# EAGLE board periph_rev4 (EAGLE 5.06)
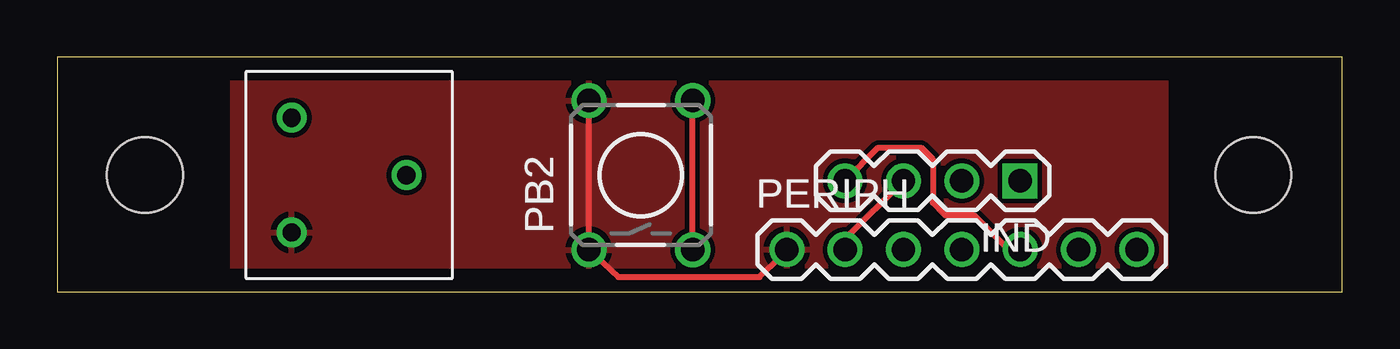
[diagram p0: board, top side]
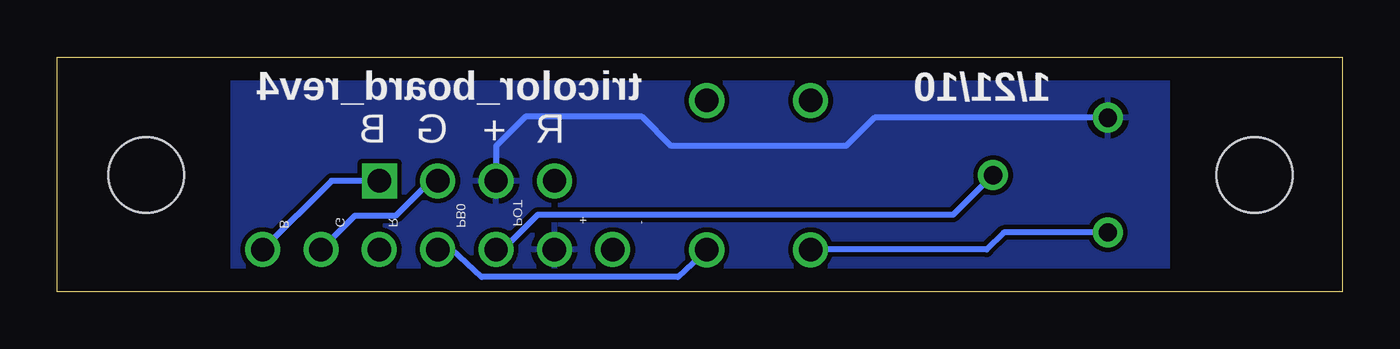
[diagram p1: board, bottom side, seen from below]

Size 55.93 x 10.21 mm. Coordinates in mm from the lower left corner, seen from the top.
Outline: 0,0 55.93,0 55.93,10.21 0,10.21 0,0
Copper layers (1*16): Top 0.035mm / dielectric 1.5mm / Bottom 0.035mm
Design rules "default": minimum track width 10mil, minimum drill 24mil, track to track 8mil, track to pad 8mil, pad to pad 8mil, via to via 8mil, smd to smd 8mil, copper to edge 40mil, drill to drill 8mil, minimum pad ring 10mil, minimum via ring 8mil, stop-mask expansion 4mil, vias tented up to drill 0mil, thermal gap 10mil

## Footprints (pad centres in the part's own frame; a part is rotated, then mirrored left to right if it is on the bottom)
1X04 = drill 1.016 square: 1 0,0 | drill 1.016 round: 2 2.54,0; 3 5.08,0; 4 7.62,0
TACTILE-PTH = drill 1.016 round: 1 -3.251,2.261; 2 3.251,2.261; 3 -3.251,-2.261; 4 3.251,-2.261
1X07 = drill 1.016 round: 1 0,0; 2 2.54,0; 3 5.08,0; 4 7.62,0; 5 10.16,0; 6 12.7,0; 7 15.24,0
POT_TRIM = drill 0.8 round: GND 2.5,-2.5; POT -2.5,0; PWR 2.5,2.5
STAND-OFF = hole 3.302: 0,0

## Placement (x,y rotation side)
IND  [1X04]  41.91,4.83 180 top
PB2  [TACTILE-PTH]  25.4,5.08 90 top
PERIPH  [1X07]  31.75,1.83 0 top
U$1  POT_3310  [POT_TRIM]  12.7,5.08 180 top
U$5  [STAND-OFF]  3.81,5.08 90 top
U$6  [STAND-OFF]  52.07,5.08 0 top

## Library data of the parts
IND PB2 PERIPH U$5 U$6 = SparkFun
U$1 = NBitWonder

## Nets
BLUE: IND.1 PERIPH.7
GREEN: IND.2 PERIPH.6
PB_0: PB2.3 PB2.4 PERIPH.4
POT: PERIPH.3 U$1.POT
PWR: IND.3 PERIPH.2 U$1.GND
RED: IND.4 PERIPH.5
VSS: PB2.1 PB2.2 PERIPH.1 U$1.PWR

## Tracks (layer width: path | path; a pad name or v marks a point on that pad's centre or on a via)
BLUE
  Bottom 0.254: IND.1 43.99,4.83 PERIPH.7
GREEN
  Bottom 0.254: IND.2 39.68,4.83 41.21,3.3 42.98,3.3 PERIPH.6
PB_0
  Top 0.254: PB2.3 PB2.4
  Bottom 0.254: PERIPH.4 38.76,1.83 37.45,0.64 28.92,0.64 PB2.3
POT
  Bottom 0.254: PERIPH.3 36.53,1.83 35.02,3.35 16.93,3.35 U$1.POT
PWR
  Top 0.254: PERIPH.2 34.3,2.29 IND.3
  Bottom 0.254: U$1.GND 20.36,7.58 21.59,6.35 29.21,6.35 30.48,7.62 35.56,7.62 36.83,6.35 IND.3
  pour Bottom: 7.62,10.16 7.62,0 48.26,0 48.26,10.16
RED
  Top 0.254: PERIPH.5 41.41,1.83 39.9,3.34 38.65,3.34 38.11,3.88 38.11,5.78 37.62,6.27 35.73,6.27 IND.4
VSS
  Top 0.254: PERIPH.1 31.75,1.76 30.57,0.64 24.41,0.64 PB2.1 PB2.2
  Bottom 0.254: U$1.PWR 14.73,2.58 15.47,1.83 PB2.1
  pour Top: 7.62,10.16 7.62,0 48.26,0 48.26,10.16

## Text on the board
bPlace: 1/21/10 | tricolor_board_rev4 | R | + | G | B | - | + | POT | PB0 | R | G | B
_tNames: PERIPH | PERIPH | PB2 | PB2 | IND | IND